# EAGLE board Clock (EAGLE 9.7.0)

Size 213.75 x 88.1 mm. Coordinates in mm from the lower left corner, seen from the top.
Outline: 0,0 213.75,0 213.75,88.1 0,88.1 0,0
Copper layers (1*16): Top 0.035mm / dielectric 1.5mm / Bottom 0.035mm
Design rules "default": minimum track width 6mil, minimum drill 0.35mm, track to track 6mil, track to pad 6mil, pad to pad 6mil, via to via 6mil, smd to smd 6mil, copper to edge 40mil, drill to drill 6mil, minimum pad ring 10mil, minimum via ring 8mil, stop-mask expansion 4mil, vias tented up to drill 0mil, thermal gap 10mil

## Footprints (pad centres in the part's own frame; a part is rotated, then mirrored left to right if it is on the bottom)
BAT_3002 = smd 3.96 x 3.96: N 0,0.65 | smd 5.08 x 5.08: P 12.825,0.65; P1 -12.825,0.65
CAP-THRU-2.54MM = drill 1.016 pad 1.88: 1 -1.27,0; 2 1.27,0
LEDRD254W60D565H860B = drill 0.981 pad 1.581: 1 -1.27,0; 2 1.27,0
RESAD1016W63L850D250B = drill 0.83 pad 1.43: 1 -5.08,0; 2 5.08,0
HA-06-SM065 = drill 1 pad 1.676: 1 -2.54,-2.54; 2 0,2.54; 3 2.54,-2.54
SWITCH-SPDT-PTH-8.5X3.7MM = drill 1.016 pad 1.88: 1 -2.54,0; 2 0,0; 3 2.54,0
SWITCH-MOMENTARY-PTH-6.5MM = drill 1.016 pad 1.88: 1 -3.251,2.261; 2 3.251,2.261; 3 -3.251,-2.261; 4 3.251,-2.261
DIP826W53P254L959H508Q8B = drill 0.786 pad 1.386: 1 -4.13,3.81; 2 -4.13,1.27; 3 -4.13,-1.27; 4 -4.13,-3.81; 5 4.13,-3.81; 6 4.13,-1.27; 7 4.13,1.27; 8 4.13,3.81
DIP762W53P254L1969H508Q14B = drill 0.743 pad 1.343: 1 -3.81,7.62; 2 -3.81,5.08; 3 -3.81,2.54; 4 -3.81,0; 5 -3.81,-2.54; 6 -3.81,-5.08; 7 -3.81,-7.62; 8 3.81,-7.62; 9 3.81,-5.08; 10 3.81,-2.54; 11 3.81,0; 12 3.81,2.54; 13 3.81,5.08; 14 3.81,7.62

## Placement (x,y rotation side)
BAT2  BR2016  [BAT_3002]  197.99,33.68 270 top
BAT3  BR2016  [BAT_3002]  197.99,64.16 270 top
C2  1u  [CAP-THRU-2.54MM]  19.75,30.52 90 top
C3  0.1u  [CAP-THRU-2.54MM]  52.77,61 270 top
D1  RED  [LEDRD254W60D565H860B]  150.56,80.05 0 top
D2  RED  [LEDRD254W60D565H860B]  23.47,14.01 0 top
D3  RED  [LEDRD254W60D565H860B]  54.04,14.01 0 top
D4  RED  [LEDRD254W60D565H860B]  79.44,7.91 0 top
R1  1k  [RESAD1016W63L850D250B]  151.83,74.97 90 top
R2  1k  [RESAD1016W63L850D250B]  19.75,62.27 90 top
R3  1k  [RESAD1016W63L850D250B]  14.67,54.65 0 top
R4  1k  [RESAD1016W63L850D250B]  24.83,19.09 90 top
R5  1k  [RESAD1016W63L850D250B]  40.07,26.71 90 top
R6  1M  [RESAD1016W63L850D250B]  50.23,62.27 90 top
R7  1k  [RESAD1016W63L850D250B]  55.31,19.09 90 top
R8  1k  [RESAD1016W63L850D250B]  75.63,26.71 90 top
R9  1k  [RESAD1016W63L850D250B]  80.71,26.71 90 top
R10  1k  [RESAD1016W63L850D250B]  80.71,12.99 90 top
RPOT1  1M  [HA-06-SM065]  7.05,49.57 180 top
S1  TOGGLE  [SWITCH-SPDT-PTH-8.5X3.7MM]  65.47,41.95 0 top
S2  SWITCH_MOMENTARY  [SWITCH-MOMENTARY-PTH-6.5MM]  37.53,45.76 90 top
U1  LM555_DIP  [DIP826W53P254L959H508Q8B]  21.02,45.76 90 top
U2  LM555_DIP  [DIP826W53P254L959H508Q8B]  51.5,45.76 90 top
U3  LM555_DIP  [DIP826W53P254L959H508Q8B]  76.9,45.76 90 top
U4  74HC08_PDIP  [DIP762W53P254L1969H508Q14B]  113.73,45.76 90 top
U5  74HC04_PDIP  [DIP762W53P254L1969H508Q14B]  95.95,45.76 90 top
U6  74HC32_PDIP  [DIP762W53P254L1969H508Q14B]  131.51,45.76 90 top

## Library data of the parts
BAT2 BAT3 = Tinkercad; CATEGORY: Battery-Holder; CELL_DIAMETER: 20mm; DESCRIPTION: Battery Retainer Coin, 20.0mm 1 Cell SMD (SMT) Tab; MANUFACTURER: Keystone Electronics; MPN: 3002; PART_STATUS: ACTIVE; ROHS_COMPLIANT: COMPLIANT; SERIES: -; SUB_CATEGORY: Holder; TYPE: Coin Cell
C2 C3 R1-R10 RPOT1 S1 S2 U4-U6 = Tinkercad
D1-D4 = Tinkercad; CATEGORY: Opto-Electronic; SUB-CATEGORY: LED; VALUE: LED_RED
U1-U3 = Tinkercad; CATEGORY: IC_Clock-Timing; CURRENT-SUPPLY: 10mA; DESCRIPTION: IC OSC SINGLE TIMER 100KHZ 8-DIP; FREQUENCY: 100kHz; MANUFACTURER: Texas Instruments; MPN: LM555CN/NOPB; OPERATING_TEMP: 0°C to 70°C; PART_STATUS: Active; ROHS_COMPLIANT: ROHS3 Compliant; SUB-CATEGORY: Timer

## Nets
BAT2+: BAT2.P BAT2.P1 R2.2 R5.1 R6.2 R8.1 R9.1 U1.8 U2.8 U3.8 U4.14 U5.14 U6.14
BAT2-: BAT2.N BAT3.P BAT3.P1
BAT3-: BAT3.N C2.1 C3.1 R1.1 R4.2 R7.2 R10.2 S1.2 S2.1 S2.2 U1.1 U2.1 U3.1 U3.6 U4.7 U5.7 U5.13 U6.7
D1_C: D1.2 R1.2
D2_C: D2.2 R4.1
D3_C: D3.2 R7.1
D4_C: D4.2 R10.1
R3_1: R3.1 RPOT1.1
U1_DIS: R2.1 R3.2 U1.7
U1_OUT: D2.1 U1.3 U4.2
U1_THR: C2.2 RPOT1.2 U1.2 U1.6
U2_DIS: C3.2 R6.1 U2.6 U2.7
U2_TR: R5.2 S2.3 S2.4 U2.2
U3_!RST: R9.2 S1.3 U3.4
U3_OUT: D4.1 U3.3 U4.4 U5.1
U3_TR: R8.2 S1.1 U3.2
U4_1Y: U4.3 U6.1
U4_2B: D3.1 U2.3 U4.5
U4_2Y: U4.6 U6.2
U4_4Y: D1.1 U4.11
U5_1Y: U4.1 U5.2
U5_6Y: U4.13 U5.12
U6_1Y: U4.12 U6.3

## Tracks (layer width: path | path; a pad name or v marks a point on that pad's centre or on a via)
BAT2+  (12 unrouted)
BAT2-  (2 unrouted)
BAT3-  (17 unrouted)
D1_C  (1 unrouted)
D2_C  (1 unrouted)
D3_C  (1 unrouted)
D4_C  (1 unrouted)
R3_1  (1 unrouted)
U1_DIS  (2 unrouted)
U1_OUT  (2 unrouted)
U1_THR  (3 unrouted)
U2_DIS  (3 unrouted)
U2_TR  (3 unrouted)
U3_!RST  (2 unrouted)
U3_OUT  (3 unrouted)
U3_TR  (2 unrouted)
U4_1Y  (1 unrouted)
U4_2B  (2 unrouted)
U4_2Y  (1 unrouted)
U4_4Y  (1 unrouted)
U5_1Y  (1 unrouted)
U5_6Y  (1 unrouted)
U6_1Y  (1 unrouted)